# Altium PCB CG65_PCB.PcbDoc
Units mil, origin at the board's own origin, x right, y up, seen from the top; angles counter-clockwise.
Board outline 2150 x 3360 mil, 2 copper layers (Top Layer, Bottom Layer); 14 components, 13 nets, 85 pads, 0 vias.
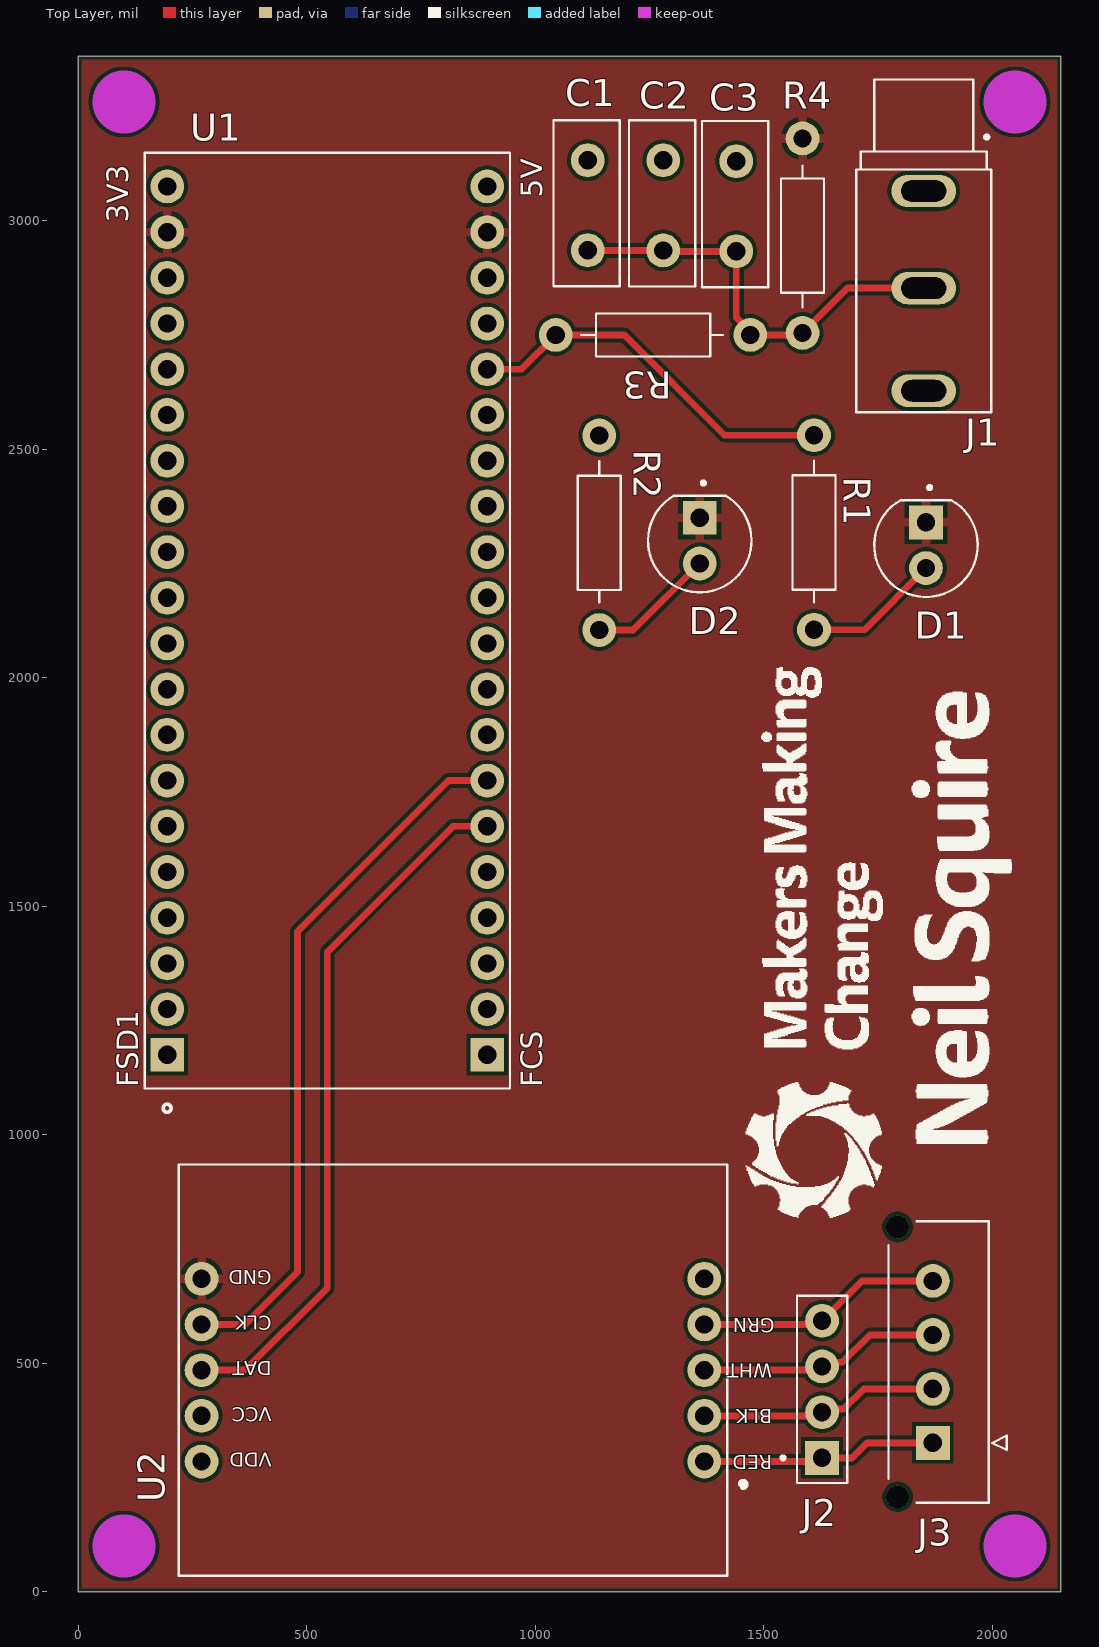
[diagram p0: Top Layer view]
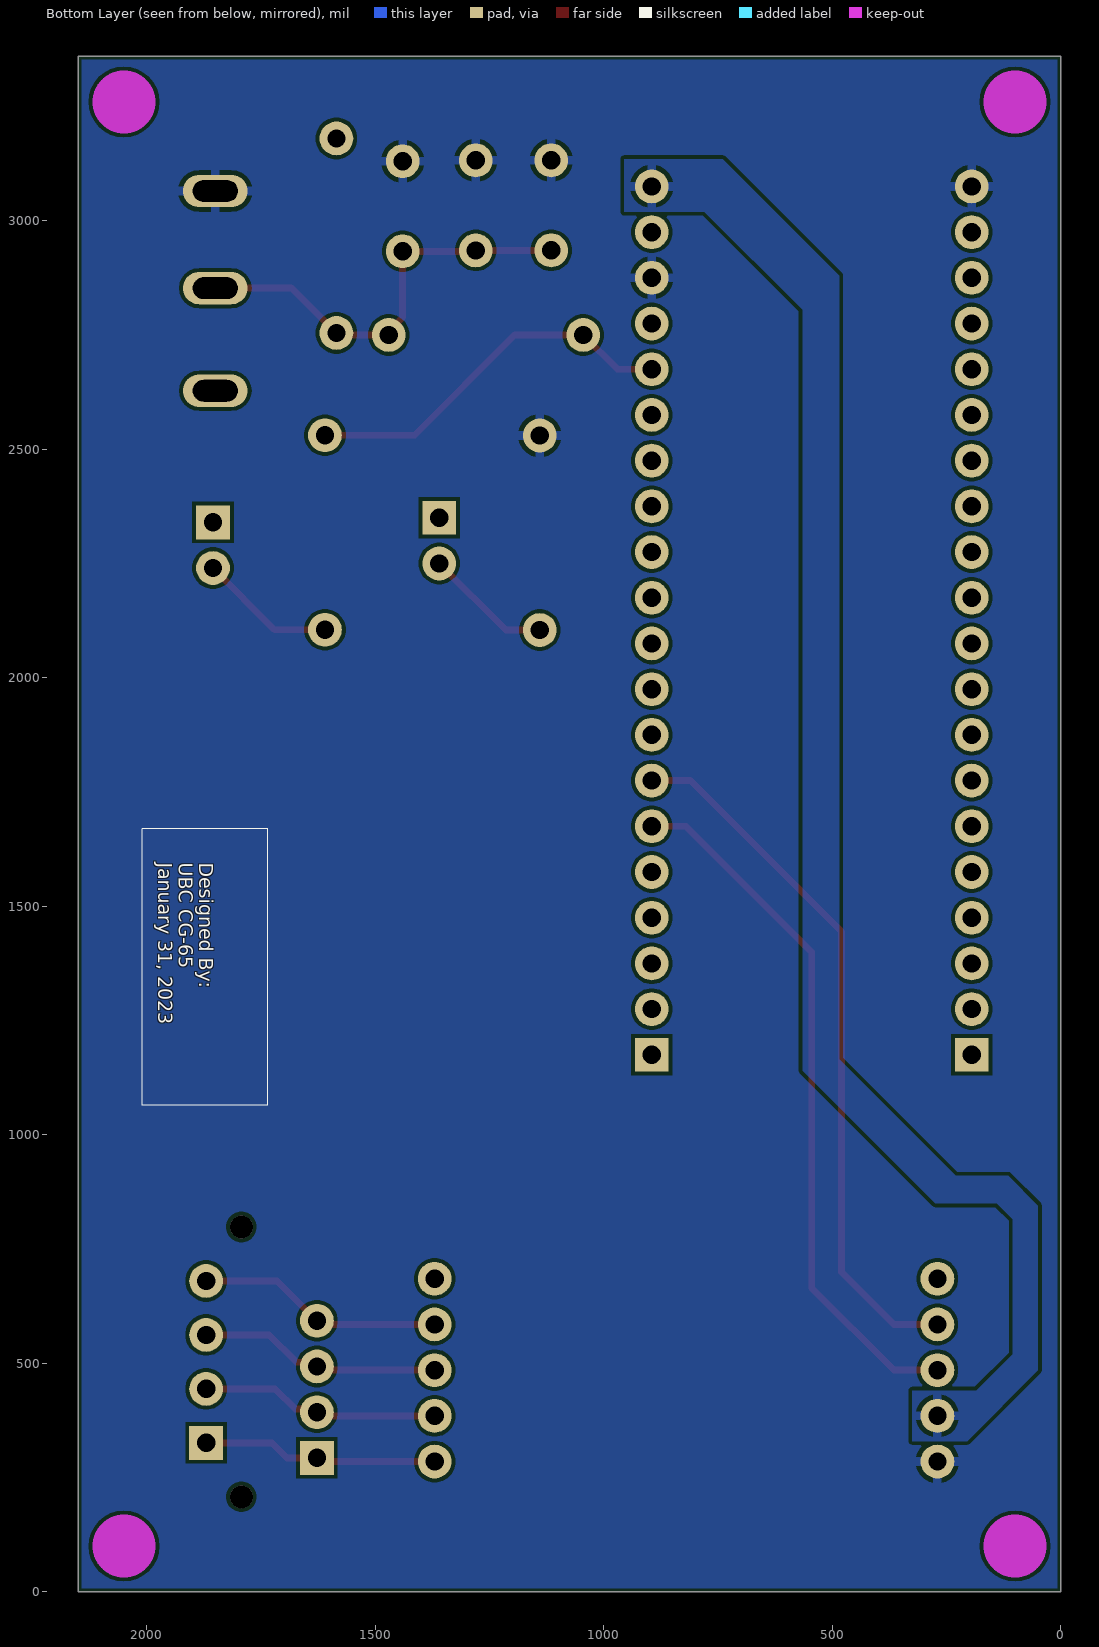
[diagram p1: Bottom Layer view, seen from below]

## Layer stack, top to bottom
Top Solder: solder mask 0.4, Solder Resist, Dk 3.5
Top Layer: signal copper 1.4
Dielectric 1: dielectric 12.6, FR-4, Dk 4.8
Bottom Layer: signal copper 1.4
Bottom Solder: solder mask 0.4, Solder Resist, Dk 3.5

## Board outline
0,0 2150,0 2150,3360 0,3360

## Design rules (kind name [scope] priority, off if disabled: settings)
BoardOutlineClearance [All] p1: gap=7.87 ignorepadtopadclearanceinfootprint=FALSE except(15.75: Arc-SplitBarrior Arc-SplitContinuation Track-SplitBarrior Track-SplitContinuation SMDPad-SplitBarrior SMDPad-SplitContinuation THPad-SplitBarrior THPad-SplitContinuation Via-SplitBarrior Via-SplitContinuation Fill-SplitBarrior Fill-SplitContinuation Poly-SplitBarrior Poly-SplitContinuation Region-SplitBarrior Region-SplitContinuation Text-SplitBarrior Text-SplitContinuation)
Clearance "Clearance Bottom Layer" [OnLayer('Bottom Layer')] p1: gap=8 ignorepadtopadclearanceinfootprint=TRUE except(10: Arc-Text Track-Text SMDPad-Text THPad-Text Via-Text Fill-Text Poly-Text Region-Text Text-Text)
Clearance "Clearance Top Layer" [OnLayer('Top Layer')] p2: gap=8 ignorepadtopadclearanceinfootprint=TRUE except(10: Arc-Text Track-Text SMDPad-Text THPad-Text Via-Text Fill-Text Poly-Text Region-Text Text-Text)
Clearance [All] p3: gap=7.87 ignorepadtopadclearanceinfootprint=FALSE except(3.5: Arc-Arc Arc-Track Arc-SMDPad Track-Track Track-SMDPad SMDPad-SMDPad; 5: Arc-Via Track-Via SMDPad-Via THPad-Via Via-Via; 10: Arc-Text Track-Text SMDPad-Text THPad-Text Via-Text Fill-Text Poly-Text Region-Text Text-Text)
HoleSize [All] p1: absolutevalues=TRUE maxlimit=248.03 minlimit=7.87 maxpercent=80.000 minpercent=20.000
MinimumAnnularRing [All] p1: minimumring=3
MinimumSolderMaskSliver [All] p1: minsoldermaskwidth=3.94
PolygonConnect PolygonConnect_1 [All] p1: thpad.connectstyle=Relief thpad.reliefconductorwidth=20 thpad.reliefentries=4 thpad.polygonreliefangle="90 Angle" thpad.airgapwidth=10 smdpad.connectstyle=Relief smdpad.reliefconductorwidth=20 smdpad.reliefentries=4 smdpad.polygonreliefangle="90 Angle" smdpad.airgapwidth=10 via.connectstyle=Direct via.reliefconductorwidth=20 via.reliefentries=4 via.polygonreliefangle="90 Angle" via.airgapwidth=10
RoutingCorners [All] p1: cornerstyle=Round minsetback=100 maxsetback=100
RoutingVias [All] p1: holewidth=19.68 width=39.37 viastyle="Through Hole" minholewidth=7.87 minwidth=17.72 maxholewidth=39.37 maxwidth=78.74
SilkToSilkClearance [All] p1: silktosilkclearance=3.94
SilkToSolderMaskClearance [IsPad] p1: minsilkscreentomaskgap=3.94 clearancetoexposedcopper=TRUE
SolderMaskExpansion [All] p1: expansion=4 istentingtop=FALSE
Width [All] p1: maxlimit=100 minlimit=3.5 preferedwidth=15
25 further rules are at their usual default settings.

## Components (designator, comment, footprint, x,y, rotation, side; value= is the part's Value field where it differs from the comment)
C1 "0.33uF" "TH CAPACITOR" 1115.03,2935.08 r90 top
C2 "0.33uF" "TH CAPACITOR" 1280,2935 r90 top
C3 "0.33uF" "TH CAPACITOR" 1440,2933 r90 top
D1 "LED" "LED TH BLUE" 1855,2340 r270 top
D2 "LED" "LED TH GREEN" 1360,2350 r270 top
J1 "MJ-3502" MJ-3502N 1850,3065 r270 top
J2 "1x4 Header" "1x4 Standard Header" 1627.63,293.07 r90 top
J3 "Molex 436500427" MOLEX_436500427 1870.01,325.86 r270 top
R1 "220 Ohms" "TH Resistor" 1610,2105 r90 top
R2 "220 Ohms" "TH Resistor" 1140,2104.41 r90 top
R3 "22k" "TH Resistor" 1470.59,2750 r180 top
R4 "4.7k" "TH Resistor" 1585,3180 r270 top
U1 "ESP32-PICO-D4" ESP32-PICO-KIT 195,1175 r90 top
U2 "LOAD CELL AMP HX711" SEN-13879 1370,285 r180 top

## Footprints (in the part's own frame and the unit in brackets; to place one, negate y for a bottom-side part, rotate by r counter-clockwise, add the part's x,y. Pads: shape width x height; smd on the part's side, far side on the other; paste and mask are expansions set on the pad)
"1x4 Standard Header" [mil]
  rect 74x74 hole 40: 1(0,0)
  round 74 hole 40: 2(100,0) 3(200,0) 4(300,0)
  silkscreen extent -55,-55 355,89
ESP32-PICO-KIT [mil] "Standard Microcontroller"
  rect 74x74 hole 40: J2_1(0,0) J3_1(0,-700)
  round 74 hole 40: J2_2(100,0) J2_3(200,0) J2_4(300,0) J2_5(400,0) J2_6(500,0) J2_7(600,0) J2_8(700,0) J2_9(800,0) J2_10(900,0) J2_11(1000,0) J2_12(1100,0) J2_13(1200,0) J2_14(1300,0) J2_15(1400,0) J2_16(1500,0) J2_17(1600,0) J2_18(1700,0) J2_19(1800,0) J2_20(1900,0) J3_2(100,-700) J3_3(200,-700) J3_4(300,-700) J3_5(400,-700) J3_6(500,-700) J3_7(600,-700) J3_8(700,-700) J3_9(800,-700) J3_10(900,-700) J3_11(1000,-700) J3_12(1100,-700) J3_13(1200,-700) J3_14(1300,-700) J3_15(1400,-700) J3_16(1500,-700) J3_17(1600,-700) J3_18(1700,-700) J3_19(1800,-700) J3_20(1900,-700)
  silkscreen extent -126,-750 1974,50, body extent -74,-754 2010,54, height 308
"LED TH BLUE" [mil] "Standard 5mm Through Hole LED"
  rect 74x74 hole 40: 1(0,0)
  round 74 hole 40: 2(100,0)
  silkscreen extent -80,-113 163,113, body extent -51,-116 165,116, height 340
"LED TH GREEN" [mil] "Standard 5mm Through Hole LED"
  rect 74x74 hole 40: 1(0,0)
  round 74 hole 40: 2(100,0)
  silkscreen extent -80,-113 163,113, body extent -50,-116 166,116, height 340
MJ-3502N [mm] "3.5mm Mono Jack RA"
  oval 1.8x3.6 hole 1.2 slot 2.5 at 90 deg: 1(0,0) 2(5.4,0) 3(11.1,0)
  silkscreen extent -6.2,-3.75 12.3,3.75, body extent -6.2,-3.91 12.3,3.7, height 11.26
MOLEX_436500427 [mm]
  rect 1.88x1.88 hole 1.02 mask+0.076: 1(0,0)
  round 1.88 hole 1.02 mask+0.076: 2(-3,0) 3(-6,0) 4(-9,0)
  round 1.27 hole 1.27 unplated mask+0.076: M1(3,-1.96) M2(-12,-1.96)
  silkscreen extent -12.32,-2.47 3.32,4.1, body extent -12.33,-2.47 3.32,3.1, height 10
SEN-13879 [mil] "Load Cell Amplifier"
  round 74 hole 40: 1(0,0) 2(0,-100) 3(0,-200) 4(0,-300) 5(0,-400) 6(1100,-400) 7(1100,-300) 8(1100,-200) 9(1100,-100) 10(1100,0)
  silkscreen extent -91,-650 1150,250, body extent -50,-650 1150,250, height 261
"TH CAPACITOR" [mil]
  round 74 hole 40: 1(0,0) 2(197,0)
  silkscreen extent -79,-70 285,75
"TH Resistor" [mil]
  round 74 hole 40: 1(0,0) 2(425.59,0)
  silkscreen extent 60,-47 370,47

## Part data
C1 C2 C3: library part Capacitor, "Standard Capacitor, Through Hole", Supplier Part Number 1=74X9713, Supplier 1=Newark
D1: library part "LED Blue", "2V Blue LED Through Hole"
D2: library part "LED Green", "2V Green LED Through Hole"
J1: "3.5 mm, Mono, Right Angle, Through Hole, Threaded Bushing, Audio Jack Connector", Body Color=Black, Current Rating=1A, Manufacturer=CUI, Supplier Part Number 1=CP-3502MJ-ND, Body Material=Brass, Category=Uncategorized, Color=Black, ComponentLink1Description=https://www.cui.com/product/resource/digikeypdf/mj-3502.pdf?src-supplier=Digi-Key, ComponentLink1URL=https://www.cui.com/product/resource/digikeypdf/mj-3502.pdf?src-supplier=Digi-Key, Connector Type=Jack, Contact Plating=Silver, Diameter=3.5mm, Gender=Female, Lead Free="Lead Free", Manufacturer Part Number=MJ-3502, Mount="Through Hole,Panel", Number of Conductors=2, Number of Ports=1, Orientation=Horizontal, Packaging=Bulk, RoHS=Yes, Series=-, Shielding=Unshielded, Supplier 1=Digi-Key, Termination=Solder
J2: "Standard 0.1\" Header 1x4"
J3: "Molex MicroFit 3.0 Header 1x4, mates with 0436450400"
R1 R2 R3 R4: library part Resistor, "Standard Resistor, Through Hole, 1/8W"
U1: library part ESP32-PICO-KIT, "ESP32 Wifi Bluetooth Eval Board", Frequency=2.4GHz, Manufacturer="Espressif Systems", Supplier Part Number 1=1904-1030-ND, Category="RF Semiconductors and Devices", ComponentLink1Description=https://esp-idf.readthedocs.io/en/latest/get-started/get-started-pico-kit.html?src-supplier=Digi-Key, ComponentLink1URL=https://esp-idf.readthedocs.io/en/latest/get-started/get-started-pico-kit.html?src-supplier=Digi-Key, Manufacturer Part Number=ESP32-PICO-KIT, Pricing 1="1=10.00000 (USD)", RoHS=No, Stock 1=467, Supplier 1=Digi-Key
U2: "HX711 Load Cell Amplifier", Manufacturer=SparkFun, Manufacturer Part Number=SEN-13879, Max Operating Temperature=85°C, Min Operating Temperature=-45°C, Operating Supply Current=1.5mA, Supplier Part Number 1=1568-1436-ND, Output Type=Digital, Pricing 1="1=10.95000 (USD)", RoHS=No, Stock 1=1086, Supplier 1=Digi-Key

## Free pads (board coordinates)
  round 0 hole 84.65 unplated mask+4: 4(100,100) 4(100,3260) 4(2050,100) 4(2050,3260)

## Nets (pads, with @x,y where several pads share a name; then routed paths per layer and width w, separated by ;. In a path a pad name is that pad's centre, name@x,y a point inside that pad or via, vN(x,y) a via of type N, cw(c..) or ccw(c..) an arc to the next point about the centre after c; other vN are vias at no path point)
3.3V: C1.2 C2.2 C3.2 J1.1 R2.2 U1.J2_20 U1.J3_18 U2.10
5V: U1.J3_20 U2.9
BLK: J2.2 J3.2 U2.2 | length 524.4
  Top Layer w15: U2.2 1619.56,385 1634.49,399.92 1674.92,399.92 1718.97,443.97 J3.2
GND: D1.1 D2.1 R4.1 U1.J2_19 U1.J3_19 U2.6
GRN: J2.4 J3.4 U2.4 | length 539.4
  Top Layer w15: U2.4 1619.56,585 J2.4 1714.75,680.19 J3.4
IO4: R1.2 R3.2 U1.J3_16 | length 836.9
  Top Layer w15: U1.J3_16 970,2675 R3.2 1195,2750 1414.41,2530.59 R1.2
IO25: U1.J3_6 U2.8 | length 1548.5
  Top Layer w15: U2.8 365,485 545,665 545,1400 820,1675 U1.J3_6
IO26: U1.J3_7 U2.7 | length 1554.3
  Top Layer w15: U2.7 365,585 480,700 480,1445 810,1775 U1.J3_7
NetC1_1: C1.1 C2.1 C3.1 J1.2 R3.1 R4.2 | length 943.3
  Top Layer w15: C1.1 1279.92,2935.08 C2.1 1282,2933 C3.1 1440,2788.29 1470.59,2757.7 R3.1 1580.59,2750 R4.2 1682.99,2852.4 J1.2
NetD1_2: D1.2 R1.1 | length 300.9
  Top Layer w15: R1.1 1720,2105 D1.2
NetD2_2: D2.2 R2.1 | length 280.3
  Top Layer w15: R2.1 1214.41,2104.41 D2.2
RED: J2.1 J3.1 U2.1 | length 516.9
  Top Layer w15: U2.1 1619.56,285 J2.1 1693.21,293.07 1726.01,325.86 J3.1
WHT: J2.3 J3.3 U2.3 | length 531.9
  Top Layer w15: U2.3 1619.56,485 1636.99,502.42 1672.42,502.42 1732.08,562.08 J3.3
pads on no net: J1.3 J3.M1 J3.M2 U1.J2_1 U1.J2_2 U1.J2_3 U1.J2_4 U1.J2_5 U1.J2_6 U1.J2_7 U1.J2_8 U1.J2_9 U1.J2_10 U1.J2_11 U1.J2_12 U1.J2_13 U1.J2_14 U1.J2_15 U1.J2_16 U1.J2_17 U1.J2_18 U1.J3_1 U1.J3_2 U1.J3_3 U1.J3_4 U1.J3_5 U1.J3_8 U1.J3_9 U1.J3_10 U1.J3_11 U1.J3_12 U1.J3_13 U1.J3_14 U1.J3_15 U1.J3_17 U2.5

## Polygon pours and split planes (outlines as drawn)
3.3V on Bottom Layer "NONET_L02_P-001" (solid, pour order 3): -95,3445 2210,3445 2210,-145 -105,-145
5V on Bottom Layer "NONET_L02_P-001" (solid, pour order 1): 955,3135 955,3020 780,3020 565,2805 565,1140 275,850 140,850 105,815 105,520 185,440 325,440 325,330 205,330 50,485 50,845 115,910 230,910 485,1165 485,2880 740,3135
GND on Top Layer "NONET_L02_P-001" (solid, pour order 0): -95,3435 2230,3435 2230,-80 -105,-80

## Keep-outs
Keep-Out Layer:
  circle w137.8: c2050,100 r0
  circle w137.8: c2050,3260 r0
  circle w137.8: c100,3260 r0
  circle w137.8: c100,100 r0

## Silkscreen, mask and mechanical layers (free items; w line width, h text height)
Top Overlay:
  drawing of 37 lines, arcs and shapes, not listed
Bottom Overlay:
  lines w1.97: 1735,1065 2010.01,1065 2010.01,1670.01 1735,1670.01 1735,1065
  text "Designed By: / UBC CG-65 / January 31, 2023" at 1975,1595 h30 r90
Mechanical 1:
  the board outline again, w3.94

## Text inside footprints (layer, text, board x,y; h text height)
U1: Top Overlay "5V" at 1015.23,3050.45 h47.27 r90; Top Overlay "3V3" at 110,2995 h47.27 r90; Top Overlay "FCS" at 1015.59,1103.72 h47.3 r90; Top Overlay "FSD1" at 131.4,1104.47 h47.27 r90
U2: Top Overlay "VDD" at 424,304 h30 r180; Top Overlay "VCC" at 424,404 h30 r180; Top Overlay "DAT" at 424,504 h30 r180; Top Overlay "CLK" at 424,604 h30 r180; Top Overlay "GND" at 424,704 h30 r180; Top Overlay "GRN" at 1524,599 h30 r180; Top Overlay "WHT" at 1519,499 h30 r180; Top Overlay "BLK" at 1519,399 h30 r180; Top Overlay "RED" at 1519,299 h30 r180